# Altium PCB EZ_FPGA_Bridge.PcbDoc (part 2 of 2)
Units mil, origin at the board's own origin, x right, y up, seen from the top; angles counter-clockwise.
Board outline 3937 x 3150 mil, 2 copper layers (Top Layer, Bottom Layer); 28 components, 69 nets, 313 pads, 1452 vias.
Unrouted connection lines stored in the file: 1.
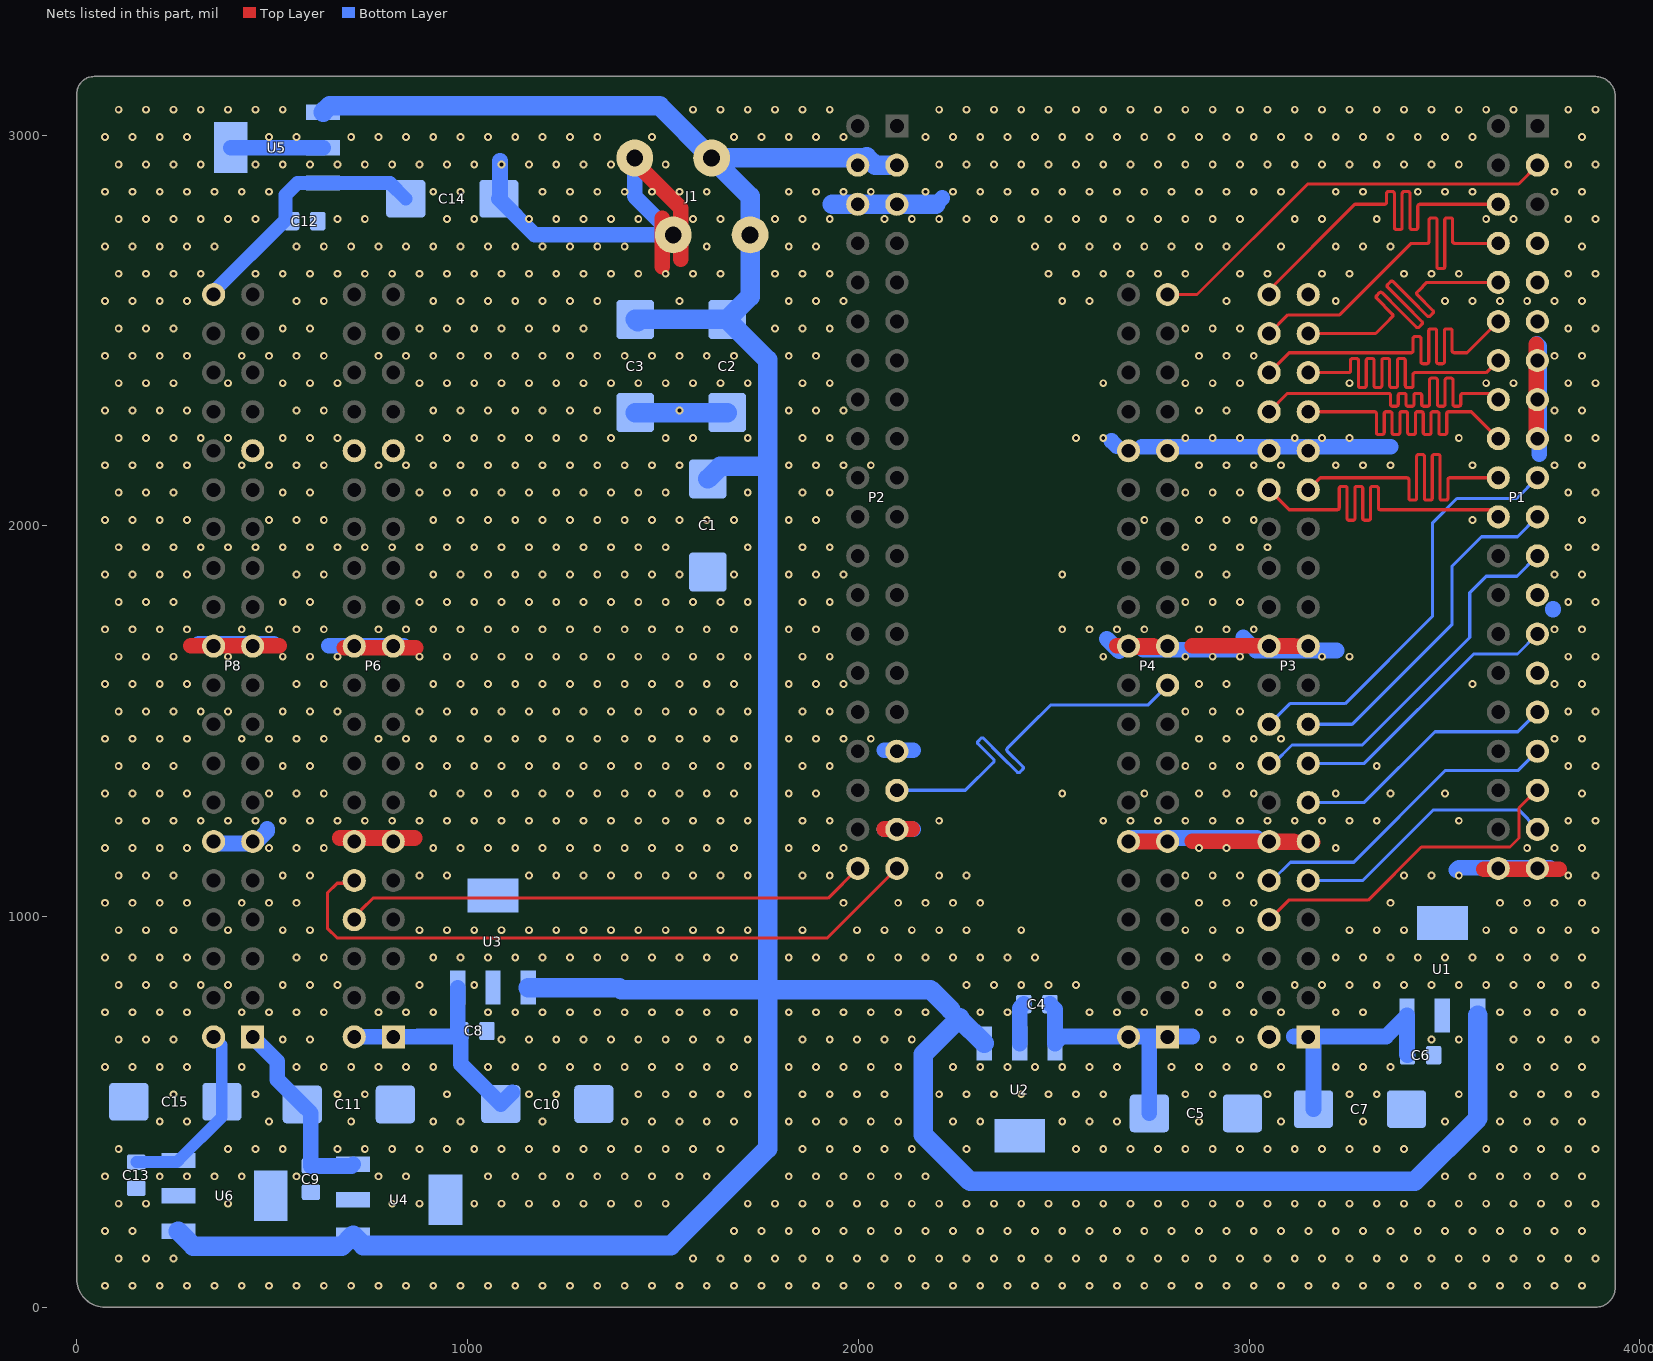
[diagram p2: the nets of this part, all layers, seen from the top]

## Via types
v1: diameter 20, hole 10, Top Layer to Bottom Layer, tented both sides, 1452 vias

## Nets (pads, with @x,y where several pads share a name; then routed paths per layer and width w, separated by ;. In a path a pad name is that pad's centre, name@x,y a point inside that pad or via, vN(x,y) a via of type N, cw(c..) or ccw(c..) an arc to the next point about the centre after c; other vN are vias at no path point) (continued)
DQ24: P1.22 P3.30 | length 1054.5
  Top Layer w8: P3.30@3051.57,2092 3102.57,2041 3221,2041 3226,2041 ccw(c3226,2046) 3231,2046 3231,2095.72 cw(c3236,2095.72) 3236,2100.72 3246,2100.72 cw(c3246,2095.72) 3251,2095.72 3251,2041 3251,2019.28 ccw(c3256,2019.28) 3256,2014.28 3266,2014.28 ccw(c3266,2019.28) 3271,2019.28 3271,2041 3271,2095.72 cw(c3276,2095.72) 3276,2100.72 3286,2100.72 cw(c3286,2095.72) 3291,2095.72 3291,2041 3291,2019.28 ccw(c3296,2019.28) 3296,2014.28 3306,2014.28 ccw(c3306,2019.28) 3311,2019.28 3311,2041 3311,2095.72 cw(c3316,2095.72) 3316,2100.72 3326,2100.72 cw(c3326,2095.72) 3331,2095.72 3331,2046 ccw(c3336,2046) 3336,2041 3395,2041 3620,2041 P1.22@3638,2023
DQ25: P1.20 P3.29 | length 1054.5
  Top Layer w8: P3.29@3151.57,2092 3182.57,2123 3330,2123 3404,2123 cw(c3404,2118) 3409,2118 3409,2070.7 ccw(c3414,2070.7) 3414,2065.7 3424,2065.7 ccw(c3424,2070.7) 3429,2070.7 3429,2123 3429,2177.29 cw(c3434,2177.29) 3434,2182.29 3444,2182.29 cw(c3444,2177.29) 3449,2177.29 3449,2123 3449,2070.7 ccw(c3454,2070.7) 3454,2065.7 3464,2065.7 ccw(c3464,2070.7) 3469,2070.7 3469,2123 3469,2177.29 cw(c3474,2177.29) 3474,2182.29 3484,2182.29 cw(c3484,2177.29) 3489,2177.29 3489,2123 3489,2070.7 ccw(c3494,2070.7) 3494,2065.7 3504,2065.7 ccw(c3504,2070.7) 3509,2070.7 3509,2118 cw(c3514,2118) 3514,2123 3519,2123 P1.20@3638,2123
DQ26: P1.18 P3.33 | length 1054.5
  Top Layer w8: P3.33@3151.57,2292 3259,2292 3321,2292 cw(c3321,2287) 3326,2287 3326,2238.76 ccw(c3331,2238.76) 3331,2233.76 3341,2233.76 ccw(c3341,2238.76) 3346,2238.76 3346,2287 cw(c3351,2287) 3351,2292 3361,2292 cw(c3361,2287) 3366,2287 3366,2238.76 ccw(c3371,2238.76) 3371,2233.76 3381,2233.76 ccw(c3381,2238.76) 3386,2238.76 3386,2287 cw(c3391,2287) 3391,2292 3401,2292 cw(c3401,2287) 3406,2287 3406,2238.76 ccw(c3411,2238.76) 3411,2233.76 3421,2233.76 ccw(c3421,2238.76) 3426,2238.76 3426,2287 cw(c3431,2287) 3431,2292 3441,2292 cw(c3441,2287) 3446,2287 3446,2238.76 ccw(c3451,2238.76) 3451,2233.76 3461,2233.76 ccw(c3461,2238.76) 3466,2238.76 3466,2287 cw(c3471,2287) 3471,2292 3481,2292 cw(c3481,2287) 3486,2287 3486,2238.76 ccw(c3491,2238.76) 3491,2233.76 3501,2233.76 ccw(c3501,2238.76) 3506,2238.76 3506,2287 cw(c3511,2287) 3511,2292 3516,2292 3569,2292 P1.18@3638,2223
DQ27: P1.16 P3.34 | length 1054.5
  Top Layer w8: P3.34@3051.57,2292 3098.57,2339 3245,2339 3357,2339 cw(c3357,2334) 3362,2334 3362,2311.08 ccw(c3367,2311.08) 3367,2306.08 3377,2306.08 ccw(c3377,2311.08) 3382,2311.08 3382,2334 cw(c3387,2334) 3387,2339 3397,2339 cw(c3397,2334) 3402,2334 3402,2311.08 ccw(c3407,2311.08) 3407,2306.08 3417,2306.08 ccw(c3417,2311.08) 3422,2311.08 3422,2334 cw(c3427,2334) 3427,2339 3437,2339 cw(c3437,2334) 3442,2334 3442,2311.08 ccw(c3447,2311.08) 3447,2306.08 3457,2306.08 ccw(c3457,2311.08) 3462,2311.08 3462,2339 3462,2372.92 cw(c3467,2372.92) 3467,2377.92 3477,2377.92 cw(c3477,2372.92) 3482,2372.92 3482,2339 3482,2311.08 ccw(c3487,2311.08) 3487,2306.08 3497,2306.08 ccw(c3497,2311.08) 3502,2311.08 3502,2339 3502,2372.92 cw(c3507,2372.92) 3507,2377.92 3517,2377.92 cw(c3517,2372.92) 3522,2372.92 3522,2339 3522,2311.08 ccw(c3527,2311.08) 3527,2306.08 3537,2306.08 ccw(c3537,2311.08) 3542,2311.08 3542,2334 cw(c3547,2334) 3547,2339 3552,2339 3622,2339 P1.16@3638,2323
DQ28: P1.12 P3.36 | length 1054.5
  Top Layer w8: P3.36@3051.57,2392 3102.57,2443 3410,2443 3415,2443 ccw(c3415,2448) 3420,2448 3420,2479.37 cw(c3425,2479.37) 3425,2484.37 3435,2484.37 cw(c3435,2479.37) 3440,2479.37 3440,2443 3440,2419.9 ccw(c3445,2419.9) 3445,2414.9 3455,2414.9 ccw(c3455,2419.9) 3460,2419.9 3460,2443 3460,2499.1 cw(c3465,2499.1) 3465,2504.1 3475,2504.1 cw(c3475,2499.1) 3480,2499.1 3480,2443 3480,2419.9 ccw(c3485,2419.9) 3485,2414.9 3495,2414.9 ccw(c3495,2419.9) 3500,2419.9 3500,2443 3500,2499.1 cw(c3505,2499.1) 3505,2504.1 3515,2504.1 cw(c3515,2499.1) 3520,2499.1 3520,2448 ccw(c3525,2448) 3525,2443 3537,2443 3558,2443 P1.12@3638,2523
DQ29: P1.10 P3.37 | length 1054.5
  Top Layer w8: P3.37@3151.57,2492 3324,2492 3352,2520 3366.82,2534.82 ccw(c3363.29,2538.36) 3366.82,2541.9 3326.59,2582.13 cw(c3330.12,2585.67) 3326.59,2589.21 3333.66,2596.28 cw(c3337.19,2592.74) 3340.73,2596.28 3384.5,2552.5 3428.28,2508.73 ccw(c3431.81,2512.26) 3435.35,2508.73 3442.42,2515.8 ccw(c3438.88,2519.34) 3442.42,2522.87 3398.64,2566.64 3354.87,2610.42 cw(c3358.41,2613.95) 3354.87,2617.49 3361.94,2624.56 cw(c3365.48,2621.03) 3369.01,2624.56 3412.79,2580.79 3456.56,2537.01 ccw(c3460.1,2540.55) 3463.63,2537.01 3470.7,2544.08 ccw(c3467.17,2547.62) 3470.7,2551.16 3430.46,2591.39 cw(c3434,2594.93) 3430.46,2598.46 3434,2602 3455,2623 P1.10@3638,2623
DQ30: P1.8 P3.38 | length 1054.5
  Top Layer w8: P3.38@3051.57,2492 3099.57,2540 3232,2540 3415,2723 3451,2723 3456,2723 ccw(c3456,2728) 3461,2728 3461,2782.92 cw(c3466,2782.92) 3466,2787.92 3476,2787.92 cw(c3476,2782.92) 3481,2782.92 3481,2723 3481,2663.08 ccw(c3486,2663.08) 3486,2658.08 3496,2658.08 ccw(c3496,2663.08) 3501,2663.08 3501,2723 3501,2782.92 cw(c3506,2782.92) 3506,2787.92 3516,2787.92 cw(c3516,2782.92) 3521,2782.92 3521,2728 ccw(c3526,2728) 3526,2723 3540,2723 P1.8@3638,2723
DQ31: P1.6 P3.40 | length 1054.5
  Top Layer w8: P3.40@3051.57,2592 3051.57,2603.57 3271,2823 3342,2823 3347,2823 ccw(c3347,2828) 3352,2828 3352,2850.38 cw(c3357,2850.38) 3357,2855.38 3367,2855.38 cw(c3367,2850.38) 3372,2850.38 3372,2823 3372,2763.62 ccw(c3377,2763.62) 3377,2758.62 3387,2758.62 ccw(c3387,2763.62) 3392,2763.62 3392,2823 3392,2850.38 cw(c3397,2850.38) 3397,2855.38 3407,2855.38 cw(c3407,2850.38) 3412,2850.38 3412,2823 3412,2763.62 ccw(c3417,2763.62) 3417,2758.62 3427,2758.62 ccw(c3427,2763.62) 3432,2763.62 3432,2818 cw(c3437,2818) 3437,2823 3461,2823 P1.6@3638,2823
GND: C1.2 C2.2 C3.2 C4.1 C5.2 C6.1 C7.2 C8.1 C9.1 C10.2 C11.2 C12.1 C13.1 C14.2 C15.2 J1.1 P1.13 P1.15 P1.17 P1.25 P1.29 P1.39 P1.40 P2.5 P2.6 P2.33 P2.37 P3.11 P3.12 P3.21 P3.22 P3.31 P3.32 P3.39 P4.11 P4.12 P4.21 P4.22 P4.31 P4.32 P6.11 P6.12 P6.21 P6.22 P6.31 P6.32 P8.11 P8.12 P8.21 P8.22 P8.31 U1.2 U1.4 U2.2 U2.4 U3.2 U3.4 U4.2 U4.4 U5.2 U5.4 U6.2 U6.4 | length 7192.9
  Top Layer w40: 292,1693 518,1693 ; P8.11@450,1192 444.68,1197.32 P8.11@455,1187 ; 672.82,1201 864,1201 ; P6.22@684.5,1688 867,1688 ; J1.1@1413,2946 1546,2813 1546,2682 ; 1498,2663 1498,2787.05 ; 2066.63,1224 2138,1224 ; 2661,1693 2754.73,1693 ; P4.12@2691.73,1192 P4.12@2692.73,1192 ; P4.22@2693.73,1689 P4.21@2793.73,1689 ; 2854.73,1193 3114.57,1193 ; 2854.73,1693 3114.57,1693 ; P3.22@3047.57,1692 3147.57,1692 P3.22@3051.57,1692 ; P3.12@3062.57,1190 P3.11@3162.57,1190 ; 3600.38,1121 3794,1121 ; P1.17@3735,2226 3735,2465 ; P4.12@2692.73,1192 P4.11@2791.73,1192 2792.73,1192 P4.12@2692.73,1192
  Bottom Layer w40: 311.67,1697.68 503.67,1697.68 ; P8.12@355,1187 455,1187 487,1219 487,1225 ; U5.4@393.89,2968 U5.2@630.11,2968 ; 645,1693 P6.21@837,1693 ; v1@1083,2934 1083,2839.91 C14.2@1080.09,2837 1172.45,2744.65 J1.1@1526.32,2744.65 1427.89,2843.07 J1.1@1427.89,2941.5 ; 2066.61,1223.27 2140.2,1223.27 ; 2067,1426 2140,1426 ; 2198.63,2823 2214.63,2839 ; U2.2@2413,675.11 2413,765.46 C4.1@2423.54,776 ; 2636,1711 P4.22@2668,1679 ; 2648,2217 2661,2204 ; P4.12@2701.38,1201 3020,1201 ; 2725,2202 3362,2202 ; 2729,1683 2969,1683 ; 2968,1198 2972,1194 ; 2985,1714 3018,1681 3224,1681 ; 3531,1119 3537,1125 3769,1125 ; 3736,2466 3743,2459 3743,2183.79 ; 3778,1785 3778,1788
  Bottom Layer w50: C3.2@1429,2289.91 C2.2@1664.5,2289.91 ; 1933,2823 P2.5@2098.63,2823 2198.63,2823
  other v1: 72,55 142,55 212,55 282,55 352,55 422,55 492,55 562,55 632,55 702,55 772,55 842,55 912,55 982,55 1052,55 1122,55 1192,55 1262,55 1332,55 1402,55 1472,55 1542,55 1612,55 1682,55 1752,55 1822,55 1892,55 1962,55 2032,55 2102,55 2172,55 2242,55 2312,55 2382,55 2452,55 2522,55 2592,55 2662,55 2732,55 2802,55 2872,55 2942,55 3012,55 3082,55 3152,55 3222,55 3292,55 3362,55 3432,55 3502,55 3572,55 3642,55 3712,55 3782,55 3852,55 107,125 177,125 247,125 1577,125 1647,125 1717,125 1787,125 1857,125 1927,125 1997,125 2067,125 2137,125 2207,125 2277,125 2347,125 2417,125 2487,125 2557,125 2627,125 2697,125 2767,125 2837,125 2907,125 2977,125 3047,125 3117,125 3187,125 3257,125 3327,125 3397,125 3467,125 3537,125 3607,125 3677,125 3747,125 3817,125 3887,125 72,195 142,195 1682,195 1752,195 1822,195 1892,195 1962,195 2032,195 2102,195 2172,195 2242,195 2312,195 2382,195 2452,195 2522,195 2592,195 2662,195 2732,195 2802,195 2872,195 2942,195 3012,195 3082,195 3152,195 3222,195 3292,195 3362,195 3432,195 3502,195 3572,195 3642,195 3712,195 3782,195 3852,195 107,265 177,265 387,265 807,265 877,265 1017,265 1087,265 1157,265 1227,265 1297,265 1367,265 1437,265 1507,265 1717,265 1787,265 1857,265 1927,265 1997,265 2067,265 2137,265 2207,265 2277,265 2347,265 2417,265 2487,265 2557,265 2627,265 2697,265 2767,265 2837,265 2907,265 2977,265 3047,265 3117,265 3187,265 3257,265 3327,265 3397,265 3467,265 3537,265 3607,265 3677,265 3747,265 3817,265 3887,265 72,335 212,335 282,335 352,335 422,335 562,335 772,335 842,335 1052,335 1122,335 1192,335 1262,335 1332,335 1402,335 1472,335 1542,335 1612,335 1822,335 1892,335 1962,335 2032,335 2102,335 2172,335 3502,335 3572,335 3642,335 3712,335 3782,335 3852,335 107,405 387,405 457,405 527,405 667,405 737,405 807,405 877,405 947,405 1017,405 1087,405 1157,405 1227,405 1297,405 1367,405 1437,405 1507,405 1577,405 1647,405 1857,405 1927,405 1997,405 2067,405 2137,405 2277,405 2557,405 2627,405 2697,405 2767,405 2837,405 2907,405 2977,405 3047,405 3117,405 3187,405 3257,405 3327,405 3397,405 3607,405 3677,405 3747,405 3817,405 3887,405 212,475 282,475 492,475 702,475 912,475 982,475 1192,475 1402,475 1472,475 1542,475 1612,475 1682,475 1822,475 1892,475 1962,475 2032,475 2102,475 2242,475 2312,475 2522,475 2592,475 2662,475 2872,475 3082,475 3292,475 3502,475 3642,475 3712,475 3782,475 3852,475 247,545 457,545 667,545 737,545 947,545 1157,545 1227,545 1437,545 1507,545 1577,545 1647,545 1717,545 1857,545 1927,545 1997,545 2067,545 2207,545 2277,545 2347,545 2417,545 2487,545 2557,545 2627,545 2837,545 2907,545 3047,545 3257,545 3327,545 3537,545 3677,545 3747,545 3817,545 3887,545 72,615 142,615 212,615 282,615 422,615 562,615 632,615 702,615 772,615 842,615 912,615 1052,615 1122,615 1192,615 1262,615 1332,615 1402,615 1472,615 1542,615 1612,615 1682,615 1822,615 1892,615 1962,615 2032,615 2102,615 2242,615 2312,615 2382,615 2452,615 2522,615 2592,615 2662,615 2802,615 2872,615 2942,615 3012,615 3082,615 3222,615 3292,615 3362,615 3642,615 3712,615 3782,615 3852,615 107,685 177,685 247,685 527,685 597,685 1087,685 1157,685 1227,685 1297,685 1367,685 1437,685 1507,685 1577,685 1647,685 1717,685 1857,685 1927,685 1997,685 2067,685 2137,685 2907,685 2977,685 3467,685 3537,685 3677,685 3747,685 3817,685 3887,685 72,755 142,755 212,755 282,755 422,755 492,755 562,755 632,755 772,755 842,755 912,755 1052,755 1122,755 1192,755 1262,755 1332,755 1402,755 1472,755 1542,755 1612,755 1682,755 1822,755 1892,755 1962,755 2032,755 2102,755 2172,755 2312,755 2382,755 2592,755 2662,755 2732,755 2872,755 2942,755 3012,755 3082,755 3222,755 3292,755 3642,755 3712,755 3782,755 3852,755 107,825 177,825 247,825 317,825 387,825 527,825 597,825 667,825 877,825 1017,825 2277,825 2347,825 2417,825 2487,825 2557,825 2837,825 2907,825 2977,825 3117,825 3187,825 3257,825 3327,825 3397,825 3467,825 3537,825 3607,825 3677,825 3747,825 3817,825 3887,825 72,895 142,895 212,895 282,895 562,895 632,895 912,895 982,895 1052,895 1122,895 1192,895 1262,895 1332,895 1402,895 1472,895 1542,895 1612,895 1682,895 1822,895 1892,895 1962,895 2032,895 2102,895 2172,895 2242,895 2312,895 2382,895 2452,895 2872,895 2942,895 3222,895 3292,895 3362,895 3432,895 3502,895 3572,895 3642,895 3712,895 3782,895 3852,895 107,965 177,965 247,965 387,965 527,965 597,965 877,965 947,965 1017,965 1087,965 1157,965 1227,965 1297,965 1367,965 1437,965 1507,965 1577,965 1647,965 1717,965 1857,965 1997,965 2067,965 2137,965 2207,965 2277,965 2417,965 2837,965 2907,965 2977,965 3257,965 3327,965 3397,965 3607,965 3677,965 3747,965 3817,965 3887,965 72,1035 142,1035 212,1035 282,1035 422,1035 492,1035 562,1035 1962,1035 2102,1035 2172,1035 2242,1035 2312,1035 2872,1035 2942,1035 3012,1035 3362,1035 3642,1035 3712,1035 3782,1035 3852,1035 107,1105 177,1105 247,1105 527,1105 597,1105 877,1105 947,1105 1157,1105 1227,1105 1297,1105 1367,1105 1437,1105 1507,1105 1577,1105 1647,1105 1717,1105 1857,1105 1927,1105 2207,1105 2277,1105 2837,1105 2907,1105 2977,1105 3397,1105 3467,1105 3537,1105 3817,1105 3887,1105 72,1175 142,1175 212,1175 282,1175 492,1175 562,1175 632,1175 912,1175 982,1175 1052,1175 1122,1175 1192,1175 1262,1175 1332,1175 1402,1175 1472,1175 1542,1175 1612,1175 1682,1175 1822,1175 1892,1175 1962,1175 2872,1175 2942,1175 3222,1175 3712,1175 3782,1175 3852,1175 107,1245 177,1245 247,1245 317,1245 387,1245 457,1245 527,1245 597,1245 667,1245 737,1245 807,1245 877,1245 947,1245 1017,1245 1087,1245 1157,1245 1227,1245 1297,1245 1367,1245 1437,1245 1507,1245 1577,1245 1647,1245 1717,1245 1857,1245 1927,1245 2207,1245 2627,1245 2697,1245 2767,1245 2837,1245 2907,1245 2977,1245 3047,1245 3117,1245 3187,1245 3257,1245 3327,1245 3537,1245 3817,1245 3887,1245 72,1315 142,1315 212,1315 282,1315 492,1315 562,1315 632,1315 912,1315 982,1315 1052,1315 1122,1315 1192,1315 1262,1315 1332,1315 1402,1315 1472,1315 1542,1315 1612,1315 1682,1315 1822,1315 1892,1315 2522,1315 2732,1315 2872,1315 2942,1315 3012,1315 3222,1315 3362,1315 3502,1315 3852,1315 107,1385 177,1385 247,1385 527,1385 597,1385 877,1385 947,1385 1017,1385 1087,1385 1157,1385 1227,1385 1297,1385 1367,1385 1437,1385 1507,1385 1577,1385 1647,1385 1717,1385 1857,1385 1927,1385 2837,1385 2907,1385 2977,1385 3327,1385 3817,1385 3887,1385 72,1455 142,1455 212,1455 282,1455 422,1455 492,1455 562,1455 632,1455 772,1455 842,1455 912,1455 982,1455 1052,1455 1122,1455 1192,1455 1262,1455 1332,1455 1402,1455 1472,1455 1542,1455 1612,1455 1682,1455 1822,1455 1892,1455 1962,1455 2032,1455 2872,1455 2942,1455 3012,1455 3082,1455 3782,1455 3852,1455 107,1525 177,1525 247,1525 317,1525 387,1525 527,1525 597,1525 667,1525 877,1525 947,1525 1017,1525 1087,1525 1157,1525 1227,1525 1297,1525 1367,1525 1437,1525 1507,1525 1577,1525 1647,1525 1717,1525 1857,1525 1927,1525 2837,1525 2907,1525 2977,1525 3817,1525 3887,1525 72,1595 142,1595 212,1595 282,1595 562,1595 632,1595 912,1595 982,1595 1052,1595 1122,1595 1192,1595 1262,1595 1332,1595 1402,1595 1472,1595 1542,1595 1612,1595 1682,1595 1822,1595 1892,1595 1962,1595 2872,1595 2942,1595 3572,1595 3782,1595 3852,1595 107,1665 177,1665 247,1665 387,1665 527,1665 597,1665 667,1665 877,1665 947,1665 1017,1665 1087,1665 1157,1665 1227,1665 1297,1665 1367,1665 1437,1665 1507,1665 1577,1665 1647,1665 1717,1665 1857,1665 1927,1665 2627,1665 2837,1665 2907,1665 2977,1665 3187,1665 3257,1665 3817,1665 3887,1665 72,1735 142,1735 212,1735 282,1735 422,1735 492,1735 562,1735 632,1735 772,1735 842,1735 912,1735 982,1735 1052,1735 1122,1735 1192,1735 1262,1735 1332,1735 1402,1735 1472,1735 1542,1735 1612,1735 1682,1735 1822,1735 1892,1735 2522,1735 2592,1735 2662,1735 2732,1735 2872,1735 2942,1735 3012,1735 3782,1735 3852,1735 107,1805 177,1805 247,1805 527,1805 597,1805 877,1805 947,1805 1017,1805 1087,1805 1157,1805 1227,1805 1297,1805 1367,1805 1437,1805 1507,1805 1577,1805 1647,1805 1717,1805 1857,1805 1927,1805 2837,1805 2907,1805 2977,1805 3817,1805 3887,1805 72,1875 142,1875 212,1875 282,1875 562,1875 632,1875 912,1875 982,1875 1052,1875 1122,1875 1192,1875 1262,1875 1332,1875 1402,1875 1472,1875 1542,1875 1682,1875 1822,1875 1892,1875 1962,1875 2522,1875 2872,1875 2942,1875 3782,1875 3852,1875 107,1945 177,1945 247,1945 317,1945 387,1945 457,1945 527,1945 597,1945 667,1945 737,1945 807,1945 877,1945 947,1945 1017,1945 1087,1945 1157,1945 1227,1945 1297,1945 1367,1945 1437,1945 1507,1945 1717,1945 1857,1945 1927,1945 2837,1945 2907,1945 2977,1945 3047,1945 3817,1945 3887,1945 72,2015 142,2015 212,2015 282,2015 492,2015 562,2015 632,2015 912,2015 982,2015 1052,2015 1122,2015 1192,2015 1262,2015 1332,2015 1402,2015 1472,2015 1542,2015 1612,2015 1682,2015 1822,2015 1892,2015 2732,2015 2872,2015 2942,2015 3012,2015 3572,2015 3852,2015 107,2085 177,2085 247,2085 527,2085 597,2085 877,2085 947,2085 1017,2085 1087,2085 1157,2085 1227,2085 1297,2085 1367,2085 1437,2085 1507,2085 1717,2085 1857,2085 1927,2085 2837,2085 2907,2085 2977,2085 3817,2085 3887,2085 72,2155 142,2155 212,2155 282,2155 422,2155 492,2155 562,2155 632,2155 772,2155 842,2155 912,2155 982,2155 1052,2155 1122,2155 1192,2155 1262,2155 1332,2155 1402,2155 1472,2155 1542,2155 1822,2155 1892,2155 1962,2155 2032,2155 2872,2155 2942,2155 3012,2155 3082,2155 3222,2155 3292,2155 3362,2155 3572,2155 3782,2155 3852,2155 107,2225 177,2225 247,2225 317,2225 387,2225 527,2225 597,2225 667,2225 877,2225 947,2225 1017,2225 1087,2225 1157,2225 1227,2225 1297,2225 1367,2225 1507,2225 1577,2225 1717,2225 1857,2225 1927,2225 2557,2225 2627,2225 2837,2225 2907,2225 2977,2225 3117,2225 3187,2225 3257,2225 3537,2225 3817,2225 3887,2225 72,2295 142,2295 212,2295 282,2295 562,2295 632,2295 912,2295 982,2295 1052,2295 1122,2295 1192,2295 1262,2295 1332,2295 1542,2295 1822,2295 1892,2295 1962,2295 2872,2295 2942,2295 3782,2295 3852,2295 107,2365 177,2365 247,2365 387,2365 527,2365 597,2365 667,2365 877,2365 947,2365 1017,2365 1087,2365 1157,2365 1227,2365 1297,2365 1367,2365 1437,2365 1507,2365 1577,2365 1647,2365 1717,2365 1857,2365 1927,2365 2627,2365 2837,2365 2907,2365 2977,2365 3257,2365 3607,2365 3677,2365 3817,2365 3887,2365 72,2435 142,2435 212,2435 282,2435 422,2435 492,2435 562,2435 632,2435 772,2435 842,2435 912,2435 982,2435 1052,2435 1122,2435 1192,2435 1262,2435 1332,2435 1402,2435 1472,2435 1542,2435 1612,2435 1682,2435 1822,2435 1892,2435 2872,2435 2942,2435 3012,2435 3782,2435 3852,2435 107,2505 177,2505 247,2505 527,2505 597,2505 877,2505 947,2505 1017,2505 1087,2505 1157,2505 1227,2505 1297,2505 1787,2505 1857,2505 1927,2505 2837,2505 2907,2505 2977,2505 3817,2505 3887,2505 72,2575 142,2575 212,2575 282,2575 562,2575 632,2575 912,2575 982,2575 1052,2575 1122,2575 1192,2575 1262,2575 1332,2575 1542,2575 1822,2575 1892,2575 1962,2575 2522,2575 2592,2575 2942,2575 3222,2575 3502,2575 3572,2575 3642,2575 3712,2575 3782,2575 3852,2575 107,2645 177,2645 247,2645 317,2645 457,2645 527,2645 597,2645 667,2645 737,2645 807,2645 877,2645 947,2645 1017,2645 1087,2645 1157,2645 1227,2645 1297,2645 1367,2645 1437,2645 1507,2645 1577,2645 1647,2645 1787,2645 1857,2645 1927,2645 2487,2645 2557,2645 2627,2645 2697,2645 2767,2645 2837,2645 2977,2645 3047,2645 3187,2645 3257,2645 3397,2645 3467,2645 3537,2645 3817,2645 3887,2645 72,2715 142,2715 212,2715 282,2715 352,2715 562,2715 632,2715 702,2715 772,2715 842,2715 912,2715 982,2715 1052,2715 1122,2715 1192,2715 1262,2715 1332,2715 1402,2715 1612,2715 1822,2715 1892,2715 2452,2715 2522,2715 2592,2715 2662,2715 2732,2715 2802,2715 2872,2715 2942,2715 3082,2715 3222,2715 3292,2715 3362,2715 3852,2715 107,2785 177,2785 247,2785 317,2785 387,2785 457,2785 667,2785 737,2785 947,2785 1017,2785 1157,2785 1227,2785 1297,2785 1367,2785 1437,2785 1577,2785 1647,2785 1787,2785 1857,2785 1927,2785 2067,2785 2137,2785 2207,2785 2277,2785 2347,2785 2417,2785 2487,2785 2557,2785 2627,2785 2697,2785 2767,2785 2837,2785 2907,2785 2977,2785 3117,2785 3187,2785 3327,2785 3607,2785 3677,2785 3817,2785 3887,2785 72,2855 142,2855 212,2855 282,2855 352,2855 422,2855 492,2855 912,2855 982,2855 1192,2855 1262,2855 1332,2855 1402,2855 1472,2855 1542,2855 1612,2855 1822,2855 1892,2855 1962,2855 2032,2855 2172,2855 2242,2855 2312,2855 2382,2855 2452,2855 2522,2855 2592,2855 2662,2855 2732,2855 2802,2855 2872,2855 2942,2855 3012,2855 3082,2855 3222,2855 3292,2855 3432,2855 3502,2855 3572,2855 3782,2855 3852,2855 107,2925 177,2925 247,2925 317,2925 457,2925 527,2925 597,2925 667,2925 737,2925 807,2925 877,2925 947,2925 1017,2925 1087,2925 1157,2925 1227,2925 1297,2925 1367,2925 1507,2925 2207,2925 2277,2925 2347,2925 2417,2925 2487,2925 2557,2925 2627,2925 2697,2925 2767,2925 2837,2925 2907,2925 2977,2925 3047,2925 3117,2925 3187,2925 3257,2925 3327,2925 3397,2925 3467,2925 3537,2925 3817,2925 3887,2925 72,2995 142,2995 212,2995 282,2995 492,2995 562,2995 702,2995 772,2995 842,2995 912,2995 982,2995 1052,2995 1122,2995 1192,2995 1262,2995 1332,2995 1472,2995 1682,2995 1752,2995 1822,2995 1892,2995 1962,2995 2172,2995 2242,2995 2312,2995 2382,2995 2452,2995 2522,2995 2592,2995 2662,2995 2732,2995 2802,2995 2872,2995 2942,2995 3012,2995 3082,2995 3152,2995 3222,2995 3292,2995 3362,2995 3432,2995 3502,2995 3572,2995 3852,2995 107,3065 177,3065 247,3065 317,3065 387,3065 457,3065 527,3065 1577,3065 1647,3065 1717,3065 1787,3065 1857,3065 1927,3065 2207,3065 2277,3065 2347,3065 2417,3065 2487,3065 2557,3065 2627,3065 2697,3065 2767,3065 2837,3065 2907,3065 2977,3065 3047,3065 3117,3065 3187,3065 3257,3065 3327,3065 3397,3065 3467,3065 3537,3065 3607,3065 3677,3065 3817,3065 3887,3065
GPIO45: P1.14 P3.35 | length 1054.5
  Top Layer w8: P3.35@3151.57,2392 3250,2392 3255,2392 ccw(c3255,2397) 3260,2397 3260,2423.11 cw(c3265,2423.11) 3265,2428.11 3275,2428.11 cw(c3275,2423.11) 3280,2423.11 3280,2392 3280,2358.89 ccw(c3285,2358.89) 3285,2353.89 3295,2353.89 ccw(c3295,2358.89) 3300,2358.89 3300,2392 3300,2423.11 cw(c3305,2423.11) 3305,2428.11 3315,2428.11 cw(c3315,2423.11) 3320,2423.11 3320,2392 3320,2358.89 ccw(c3325,2358.89) 3325,2353.89 3335,2353.89 ccw(c3335,2358.89) 3340,2358.89 3340,2392 3340,2423.11 cw(c3345,2423.11) 3345,2428.11 3355,2428.11 cw(c3355,2423.11) 3360,2423.11 3360,2392 3360,2358.89 ccw(c3365,2358.89) 3365,2353.89 3375,2353.89 ccw(c3375,2358.89) 3380,2358.89 3380,2392 3380,2423.11 cw(c3385,2423.11) 3385,2428.11 3395,2428.11 cw(c3395,2423.11) 3400,2423.11 3400,2392 3400,2358.89 ccw(c3405,2358.89) 3405,2353.89 3415,2353.89 ccw(c3415,2358.89) 3420,2358.89 3420,2387 cw(c3425,2387) 3425,2392 3468,2392 3607,2392 P1.14@3638,2423
I2C_SCL: P2.40 P6.8 | length 1314.5
  Top Layer w8: 728,1017 758,1047 1922.63,1047 P2.40@1998.63,1123
I2C_SDA: P2.39 P6.10 | length 1713.8
  Top Layer w8: P6.10@709.84,1092 702.84,1085 666,1085 641,1060 641,970 666,945 1920.63,945 P2.39@2098.63,1123
I2S_CLK: P1.37 P3.9 | length 683.3
  Bottom Layer w8: P3.9@3151.57,1092 3291,1092 3472,1273 3690,1273 3738,1225 P1.37@3738,1223
I2S_MCLK: P1.35 P3.8 | length 868.6
  Top Layer w8: P3.8@3051.57,992 3101.57,1042 3305,1042 3441,1178 3668,1178 3691,1201 3691,1278 3736,1323 P1.35@3738,1323
I2S_SD: P1.33 P3.10 | length 823.5
  Bottom Layer w8: P3.10@3051.57,1092 3059,1092 3106,1139 3268,1139 3503,1374 3689,1374 P1.33@3738,1423
I2S_WS: P1.31 P3.13 | length 682.1
  Bottom Layer w8: P3.13@3151.57,1292 3295,1292 3476,1473 3688,1473 P1.31@3738,1523
INT_N_CTL15: P1.3 P4.39 | length 1083.4
  Top Layer w8: P4.39@2791.73,2592 2867,2592 3150,2875 3690,2875 P1.3@3738,2923
PCLK: P2.35 P4.19 | length 1054.5
  Bottom Layer w8: P2.35@2098.63,1323 2274,1323 2342.5,1391.5 2346.04,1395.04 ccw(c2342.5,1398.57) 2346.04,1402.11 2306.65,1441.5 cw(c2310.18,1445.03) 2306.65,1448.57 2313.72,1455.64 cw(c2317.25,1452.1) 2320.79,1455.64 2363.71,1412.71 2406.64,1369.79 ccw(c2410.17,1373.32) 2413.71,1369.79 2420.78,1376.86 ccw(c2417.25,1380.39) 2420.78,1383.93 2381.39,1423.32 cw(c2384.93,1426.86) 2381.39,1430.39 2436.5,1485.5 2492,1541 2740.73,1541 P4.19@2791.73,1592
PMODE_0: P1.11
PMODE_1: P1.9
PMODE_2: P1.7
SPI_MISO: P1.21 P3.17 | length 893.7
  Bottom Layer w8: P3.17@3151.57,1492 3264,1492 3520,1748 3520,1897 3595,1972 3687,1972 P1.21@3738,2023
SPI_MOSI: P1.19 P3.18 | length 1087.8
  Bottom Layer w8: P3.18@3051.57,1492 3104.57,1545 3246,1545 3470,1769 3470,2008 3532,2070 3685,2070 P1.19@3738,2123
SPI_SCK: P1.27 P3.15 | length 723.5
  Bottom Layer w8: P3.15@3151.57,1392 3295,1392 3575,1672 3687,1672 P1.27@3738,1723
SPI_SSN: P1.23 P3.16 | length 973.7
  Bottom Layer w8: P3.16@3051.57,1392 3063,1392 3110,1439 3290,1439 3565,1714 3565,1829 3607,1871 3686,1871 P1.23@3738,1923
VBUS: C1.1 C2.1 C3.1 J1.2 P2.3 P2.4 U1.1 U2.1 U3.1 U4.1 U5.1 U6.1 | length 9576.8
  Bottom Layer w50: U6.1@259.89,194.45 298.34,156 678.44,156 U4.1@706.89,184.45 733.34,158 1520,158 1768,406 1768,813 ; U5.1@630.11,3058.55 646.65,3075.09 1491.14,3075.09 J1.2@1624.74,2941.5 ; U3.1@1155.55,817.89 1388.11,817.89 1393,813 1768,813 ; C3.1@1435.09,2522 C3.1@1429,2528.09 C2.1@1664.5,2528.09 ; C1.1@1615,2120.09 1646.91,2152 1768,2152 ; P2.3@2098.63,2923 2043,2923 2021.5,2944.5 2018.5,2941.5 J1.2@1624.74,2941.5 ; 2236.78,761.78 2235.78,761.78 2184.56,813 1768,813 ; 2260,741 2258.28,739.28 ; U2.1@2322.45,675.11 2258.28,739.28 ; U1.1@3585.55,746.89 3585.55,483.55 3424,322 2286,322 2166,442 2166,647 2258.28,739.28 ; J1.2@1624.74,2941.5 1723.17,2843.07 J1.2@1723.17,2744.65 1723.17,2586.76 C2.1@1664.5,2528.09 ; C2.1@1664.5,2528.09 1768,2424.59 1768,2152 ; 1768,813 1768,2152
VIO0: C6.2 C7.1 P3.1 P3.2 U1.3 | length 602.6
  Bottom Layer w40: 3114.57,693 P3.1@3160,693 ; C7.1@3164.91,507 3164.91,688.09 P3.1@3160,693 ; C6.2@3405.54,645 3404.45,646.09 U1.3@3404.45,746.89 3350.56,693 3214.57,693 P3.1@3160,693
VIO1: C4.2 C5.1 P4.1 P4.2 U2.3 | length 666
  Bottom Layer w40: C4.2@2490.46,776 2503.55,762.91 U2.3@2503.55,675.11 2521.44,693 2754.73,693 ; C5.1@2744.91,496 2744.91,683.17 2754.73,693 ; 2854.73,693 2754.73,693
VIO2: C8.2 C10.1 P6.1 P6.2 U3.3 | length 658.7
  Bottom Layer w40: P6.2@709.84,692 P6.1@809.84,692 871.84,692 872.84,693 C8.2@982.54,693 ; U3.3@974.45,817.89 974.45,715.09 C8.2@982.54,707 C8.2@982.54,693 ; C10.1@1114.54,549.63 C10.1@1084.91,520 982.54,622.37 C8.2@982.54,693
VIO3: C13.2 C15.1 P8.2 U6.3 | length 480.8
  Bottom Layer w30: C13.2@152,371.46 255.8,371.46 U6.3@259.89,375.55 371.09,486.76 C15.1@371.09,526 371.09,670.91 P8.2@350,692
VIO4: C12.2 C14.1 P8.40 U5.3 | length 668.5
  Bottom Layer w35: P8.40@350,2592 350,2599 534,2783 534,2847 564.45,2877.45 U5.3@630.11,2877.45 801.46,2877.45 C14.1@841.91,2837
VIO5: C9.2 C11.1 P8.1 U4.3 | length 501.8
  Bottom Layer w40: P8.1@450,692 513,629 513,582.91 C11.1@576.91,519 599,496.91 C9.2@599,361.46 702.8,361.46 U4.3@706.89,365.55
pads on no net: C1.0 C2.0 C3.0 C4.0 C5.0 C6.0 C7.0 C8.0 C9.0 C10.0 C11.0 C12.0 C13.0 C14.0 C15.0 P1.1 P1.2 P1.4 P1.5 P2.1 P2.2 P3.3 P3.4 P3.5 P3.6 P3.7 P3.14 P4.40 P6.3 P6.4 P6.5 P6.6 P6.7 P6.9 P6.13 P6.14 P6.15 P6.16 P6.17 P6.18 P6.19 P6.20 P6.23 P6.24 P6.25 P6.26 P6.27 P6.28 P6.29 P6.30 P6.33 P6.34 P6.35 P6.36 P6.37 P6.38 P6.39 P6.40 P8.3 P8.4 P8.5 P8.6 P8.7 P8.8 P8.9 P8.10 P8.13 P8.14 P8.15 P8.16 P8.17 P8.18 P8.19 P8.20 P8.23 P8.24 P8.25 P8.26 P8.27 P8.28 P8.29 P8.30 P8.32 P8.33 P8.34 P8.35 P8.36 P8.37 P8.38 P8.39

## Polygon pours and split planes (outlines as drawn)
GND on Top Layer "Top-GND" (solid, remove dead copper, pour order 4): 277,10 3824,10 ccw(c3824,110) 3924,110 3924,915 3924,3036 ccw(c3824,3036) 3824,3136 3683,3136 114,3136 ccw(c114,3036) 14,3036 14,156 14,110 ccw(c114,110) 114,10 276,10
GND on Bottom Layer "Top-GND" (solid, remove dead copper, pour order 3): 277.48,10.44 3824.48,10.44 ccw(c3824.48,110.44) 3924.48,110.44 3924.48,915.44 3924.48,3036.44 ccw(c3824.48,3036.44) 3824.48,3136.44 3683.48,3136.44 114.48,3136.44 ccw(c114.48,3036.44) 14.48,3036.44 14.48,156.44 14.48,110.44 ccw(c114.48,110.44) 114.48,10.44 276.48,10.44

## Silkscreen, mask and mechanical layers (free items; w line width, h text height)
Top Overlay:
  region: 2165.47,1458.93 2062.47,1458.93 2062.47,1379.93 2165.47,1379.93
  region: 2160.47,1258.93 2057.47,1258.93 2057.47,1179.93 2160.47,1179.93
  region: 3803.47,1865.93 3700.47,1865.93 3700.47,1786.93 3803.47,1786.93
  region: 3799.47,1656.93 3696.47,1656.93 3696.47,1577.93 3799.47,1577.93
  region: 3213.47,2628.93 3110.47,2628.93 3110.47,2549.93 3213.47,2549.93
  region: 512.47,2230.93 409.47,2230.93 409.47,2151.93 512.47,2151.93
  rectangle: 3571.47,1086 3809,1165
  rectangle: 1930.47,2783 2168,2862
  region: 3700,2424.53 3700,2187 3779,2187 3779,2424.53
  region: 3698,2466.53 3698,2229 3777,2229 3777,2466.53
  region: 3212.53,2231 2975,2231 2975,2152 3212.53,2152
  region: 3226.53,1734 2989,1734 2989,1655 3226.53,1655
  region: 3224.53,1232 2987,1232 2987,1153 3224.53,1153
  region: 2864.53,1231 2627,1231 2627,1152 2864.53,1152
  region: 2858.53,1731 2621,1731 2621,1652 2858.53,1652
  region: 2861.53,2231 2624,2231 2624,2152 2861.53,2152
  region: 877.53,1227 640,1227 640,1148 877.53,1148
  region: 523.53,1229 286,1229 286,1150 523.53,1150
  region: 877.53,1729 640,1729 640,1650 877.53,1650
  region: 515.53,1730 278,1730 278,1651 515.53,1651
  region: 881.53,2231 644,2231 644,2152 881.53,2152
  lines w40: 93.5,2969 204.5,3093 328.5,2979 ; 206.5,2639 206.5,3074 ; 963,2562 1074,2686 1198,2572 ; 1076,2232 1076,2667 ; 2180.5,2985 2291.5,3109 2415.5,2995 ; 2293.5,2655 2293.5,3090 ; 3261,3005 3372,3129 3496,3015 ; 3374,2675 3374,3110
  text "USB" at 911,2965 h100
  text "FPGA BOARD SIDE" at 2487,1367 h100 r90
  text "FPGA BOARD SIDE" at 1344,1340 h100 r90
Bottom Overlay:
  rectangle: 2056,1380 2159,1459
  rectangle: 2051,1180 2154,1259
  rectangle: 3694,1787 3797,1866
  rectangle: 3690,1578 3793,1657
  rectangle: 3104,2550 3207,2629
  rectangle: 403,2152 506,2231
  region: 3809.53,1165 3572,1165 3572,1086 3809.53,1086
  region: 2168.53,2862 1931,2862 1931,2783 2168.53,2783
  region: 3779,2186.47 3779,2424 3700,2424 3700,2186.47
  region: 3777,2228.47 3777,2466 3698,2466 3698,2228.47
  rectangle: 2974.47,2152 3212,2231
  rectangle: 2988.47,1655 3226,1734
  rectangle: 2986.47,1153 3224,1232
  rectangle: 2626.47,1152 2864,1231
  rectangle: 2620.47,1652 2858,1731
  rectangle: 2623.47,2152 2861,2231
  rectangle: 639.47,1148 877,1227
  rectangle: 285.47,1150 523,1229
  rectangle: 639.47,1650 877,1729
  rectangle: 277.47,1651 515,1730
  rectangle: 643.47,2152 881,2231
  lines w40: 1570,1610 1681,1734 1805,1620 ; 1683,1280 1683,1715 ; 2797.5,2972 2908.5,3096 3032.5,2982 ; 2910.5,2642 2910.5,3077
  text "GND" at 1283,3112 h120 r90
  text "+" at 1882,3025 h120
  text "VIO4" at 735,3022 h40 r180
  text "USB" at 2801,3001 h100
  text "+" at 1886,2907 h120
  text "+" at 1883,2772 h120
  text "5V MAX" at 1853,2768 h40 r90
  text "USB BOARD SIDE" at 2410,1468 h100 r270
  text "VIO2" at 1274,1022 h40 r90
  text "VIO0" at 3677,749 h40 r270
  text "VIO3" at 251,650 h40
  text "VIO1" at 2624,631 h40 r90
  text "EZ FPGA Bridge V1.1 2001" at 2459,244 h60
  text "www.CircuitValley.com" at 2454,143 h60
Mechanical 1:
  lines w1: 0,108.45 ccw(c108.45,108.45) 108.45,0 3831.53,0 ccw(c3831.53,105.47) 3937,105.47 3937,3037 ccw(c3824,3037) 3824,3150 3708,3150 103.14,3150 ccw(c103.14,3046.86) 0,3046.86 0,108.45
Mechanical 13:
  text "EZ_USB_39.1" at -1251,684 h30
  text "Two row external 11.68 internal 6.6" at -1681,533 h30
  text "FPGA Internal 47.8" at -1692,273 h30
  text "FPGA external  ::66.0 , Outer 71.1" at -1795,-7 h30

## Text inside footprints (layer, text, board x,y; h text height)
P1: Bottom Overlay "1" at 3758,3123 h50 r90; Bottom Overlay "2" at 3658,3123 h50 r90; Bottom Overlay "40" at 3658,1043 h50 r90; Bottom Overlay "39" at 3758,1043 h50 r90
P2: Bottom Overlay "1" at 2118.63,3123 h50 r90; Bottom Overlay "2" at 2018.63,3123 h50 r90; Bottom Overlay "40" at 2018.63,1043 h50 r90; Bottom Overlay "39" at 2118.63,1043 h50 r90
P3: Top Overlay "1" at 3171.57,592 h50 r90; Top Overlay "2" at 3071.57,592 h50 r90; Top Overlay "40" at 3071.57,2672 h50 r90; Top Overlay "39" at 3171.57,2672 h50 r90
P4: Top Overlay "1" at 2811.73,592 h50 r90; Top Overlay "2" at 2711.73,592 h50 r90; Top Overlay "40" at 2711.73,2672 h50 r90; Top Overlay "39" at 2811.73,2672 h50 r90
P6: Top Overlay "1" at 829.84,592 h50 r90; Top Overlay "2" at 729.84,592 h50 r90; Top Overlay "40" at 729.84,2672 h50 r90; Top Overlay "39" at 829.84,2672 h50 r90
P8: Top Overlay "39" at 470,2672 h50 r90; Top Overlay "40" at 370,2672 h50 r90; Top Overlay "2" at 370,592 h50 r90; Top Overlay "1" at 470,592 h50 r90